# EAGLE board Christmas_Star (EAGLE 7.5.0)
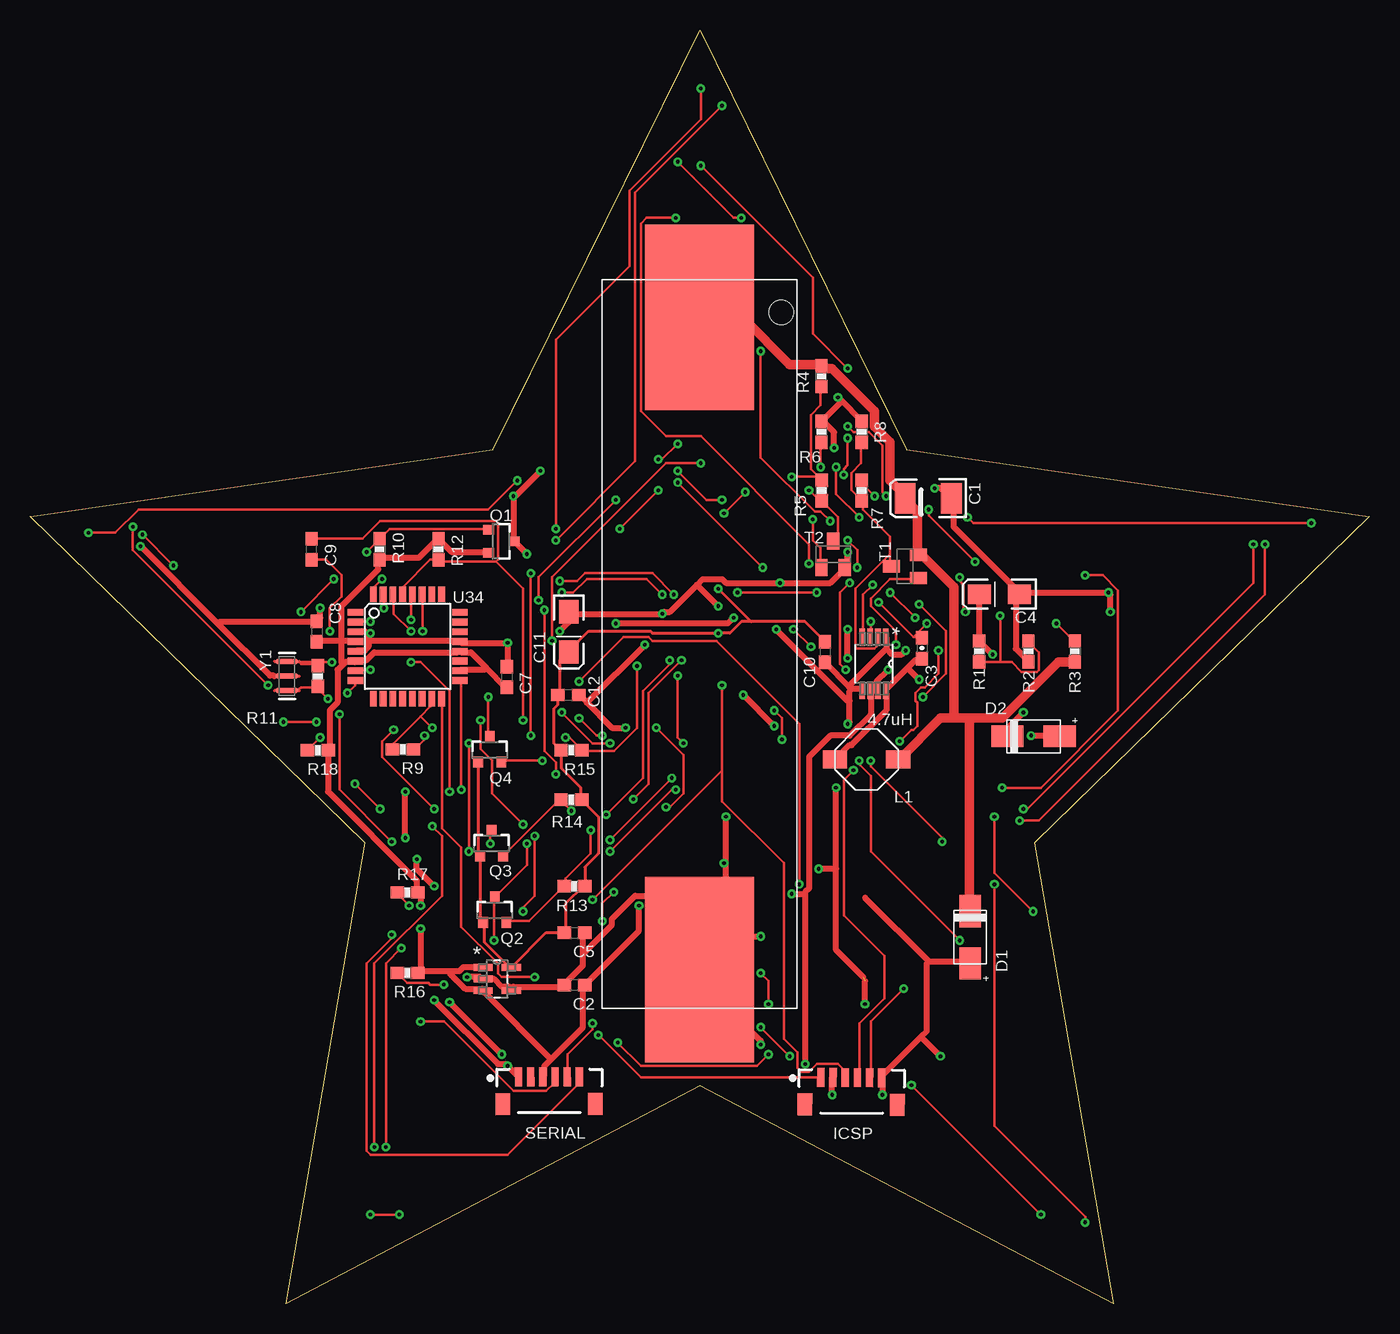
[diagram p0: board, top side]
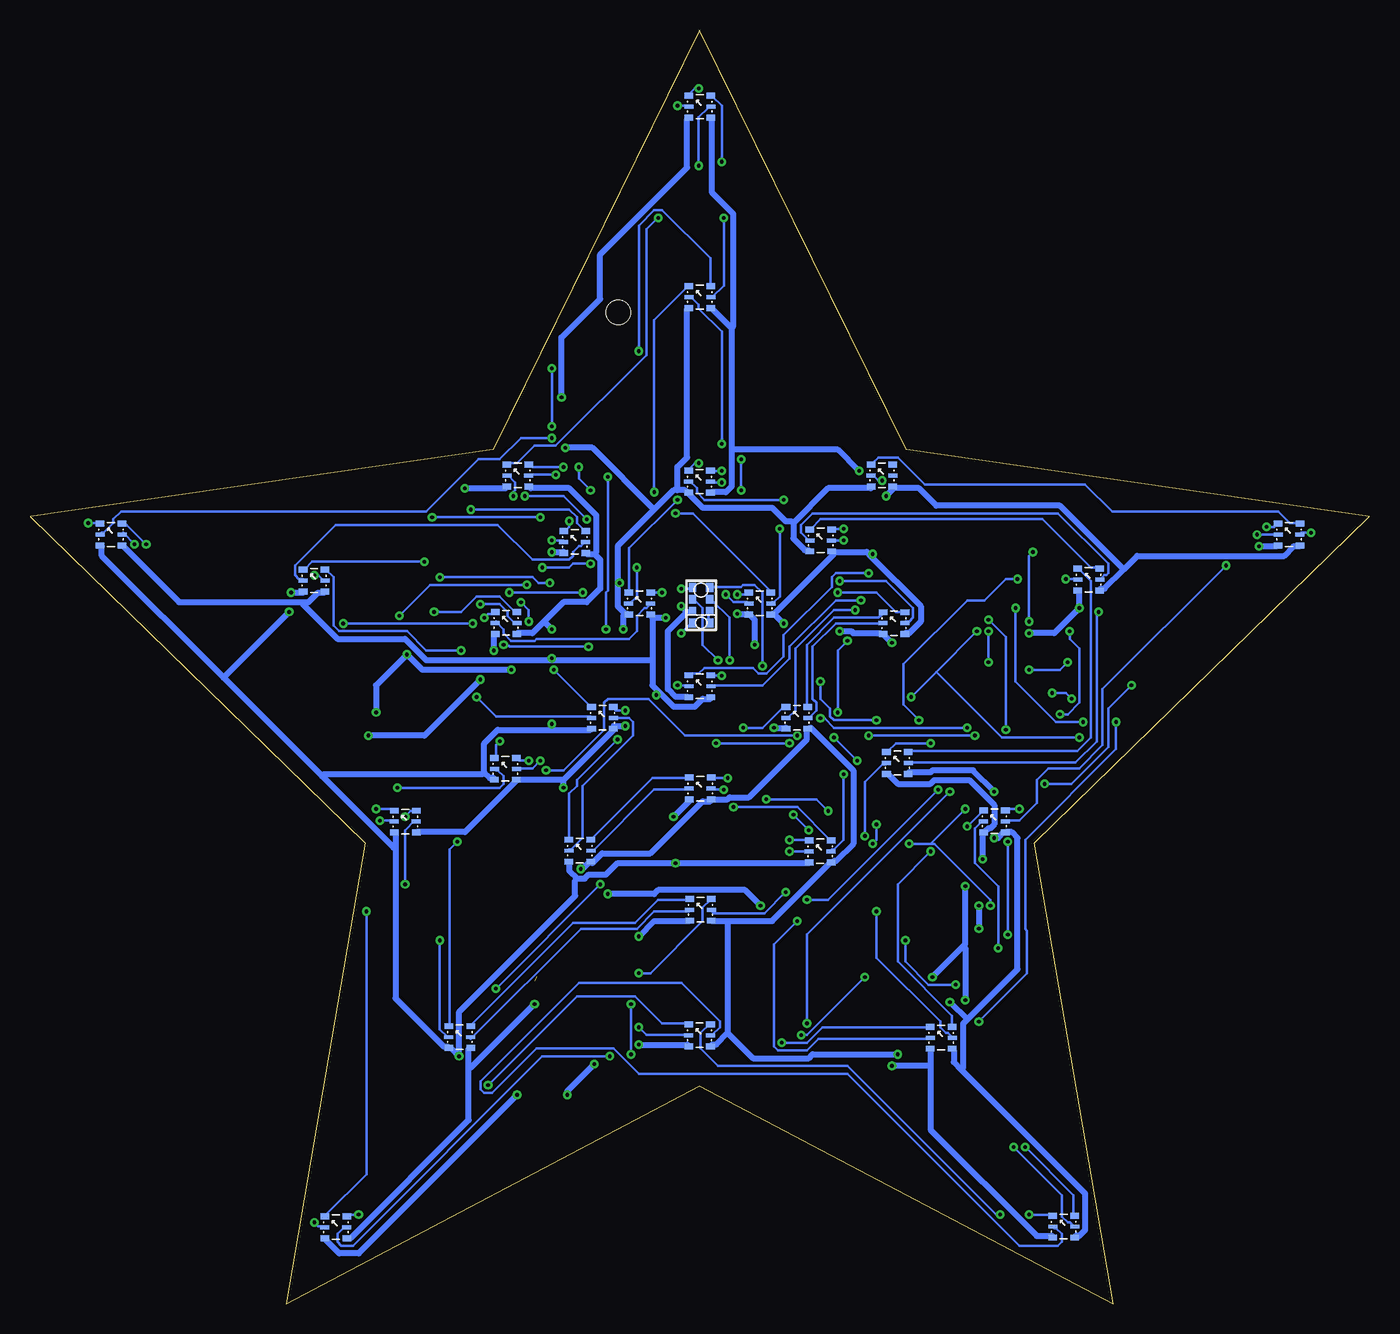
[diagram p1: board, bottom side, seen from below]

Size 110 x 104.62 mm. Coordinates in mm from the lower left corner, seen from the top.
Outline: 55,104.62 72,70.18 110,64.66 82.5,37.85 88.99,0 55,17.87 21.01,0 27.5,37.85 0,64.66 38,70.18 55,104.62
Copper layers (1*16): Top 0.035mm / dielectric 1.5mm / Bottom 0.035mm
Design rules "NYAKARUHAZ_StandardNYAK": minimum track width 6mil, minimum drill 12mil, track to track 6mil, track to pad 6mil, pad to pad 6mil, via to via 6mil, smd to smd 6mil, copper to edge 20mil, drill to drill 8mil, minimum pad ring 10mil, minimum via ring 8mil, stop-mask expansion 4mil, vias tented up to drill 0mil, thermal gap 6mil
Net classes: 0 default: width 0.203 mm; 1 5V: width 0.508 mm; 2 3.3V: width 0.254 mm; 3 GND: width 0.508 mm; 4 APA102_VCC: width 0.508 mm; 5 POWER_INPUT: width 0.762 mm; 6 SW: width 0.508 mm

## Footprints (pad centres in the part's own frame; a part is rotated, then mirrored left to right if it is on the bottom)
KEYSTONE1088 = smd 15.24 x 8.941: + 7.62,0; - 61.214,0 | hole 2: 7.2,6.7
EIA3528-KIT = smd 1.7 x 2.5: A 1.9,0; C -1.9,0
0603-CAP = smd 1.1 x 1: 1 -0.85,0; 2 0.85,0
EIA3216-KIT = smd 1.9 x 1.6: A 1.65,0; C -1.65,0
DIOM4427X270N = smd 2.65 x 1.75: A 2.15,0; C -2.15,0
GP-635T = smd 0.6 x 1.55: 1 -2.54,1.27; 2 -1.54,1.27; 3 -0.54,1.27; 4 0.46,1.27; 5 1.46,1.27; 6 2.46,1.27 | smd 1.2 x 1.8: P$1 -3.84,-0.955; P$2 3.76,-0.955
LTF5022 = smd 2 x 1.5: P$1 -2.6,0; P$2 2.6,0
SOT23-3 = smd 0.8 x 0.9: 1 -0.95,-1; 2 0.95,-1; 3 0,1.1
0603-RES = smd 1.1 x 1: 1 -0.85,0; 2 0.85,0
SOT23-BEC = smd 1 x 1.4: B -0.95,-1.1; C 0,1.1; E 0.95,-1.1
MUA08A = smd 1.372 x 0.457: 1 -2.197,0.975; 2 -2.197,0.325; 3 -2.197,-0.325; 4 -2.197,-0.975; 5 2.197,-0.975; 6 2.197,-0.325; 7 2.197,0.325; 8 2.197,0.975
DDC5 = smd 1.575 x 0.559: 1 -1.168,0.95; 2 -1.168,0; 3 -1.168,-0.95; 4 1.168,-0.95; 5 1.168,0.95
APA102_2020 = smd 0.8 x 0.3: C_IN -0.9,0; CL_OUT 0.9,0 | smd 0.8 x 0.5: D_IN -0.9,0.9; D_OUT 0.9,0.9; GND -0.9,-0.9; VCC 0.9,-0.9
TQFP32 = smd 1.27 x 0.559: 1 -4.293,2.8; 2 -4.293,2; 3 -4.293,1.2; 4 -4.293,0.4; 5 -4.293,-0.4; 6 -4.293,-1.2; 7 -4.293,-2; 8 -4.293,-2.8; 17 4.293,-2.8; 18 4.293,-2; 19 4.293,-1.2; 20 4.293,-0.4; 21 4.293,0.4; 22 4.293,1.2; 23 4.293,2; 24 4.293,2.8 | smd 0.559 x 1.27: 9 -2.8,-4.293; 10 -2,-4.293; 11 -1.2,-4.293; 12 -0.4,-4.293; 13 0.4,-4.293; 14 1.2,-4.293; 15 2,-4.293; 16 2.8,-4.293; 25 2.8,4.293; 26 2,4.293; 27 1.2,4.293; 28 0.4,4.293; 29 -0.4,4.293; 30 -1.2,4.293; 31 -2,4.293; 32 -2.8,4.293
APDS-9960 = smd 0.6 x 0.72: 1 0.7,1.455; 2 0.7,0.485; 3 0.7,-0.485; 4 0.7,-1.455; 5 -0.7,-1.455; 6 -0.7,-0.485; 7 -0.7,0.485; 8 -0.7,1.455
RESONATOR-SMD-3.2X1.3 = smd 0.45 x 1.905: 1 -1.2,0; 2 0,0; 3 1.2,0

## Placement (x,y rotation side)
BAT1  KEYSTONE1088  [KEYSTONE1088]  54.99,88.65 270 top
C1  220uF  [EIA3528-KIT]  73.79,66.17 180 top
C2  1uF  [0603-CAP]  44.7,26.16 180 top
C3  4.7pF  [0603-CAP]  73.25,53.85 270 top
C4  100uF  [EIA3216-KIT]  79.63,58.29 180 top
C5  1uF  [0603-CAP]  44.7,30.48 0 top
C7  0.1uF  [0603-CAP]  39.14,51.49 270 top
C8  0.1uF  [0603-CAP]  23.52,55.22 270 top
C9  0.1uF  [0603-CAP]  23.11,61.98 90 top
C10  1uF  [0603-CAP]  65.28,53.54 270 top
C11  100uF  [EIA3216-KIT]  44.25,55.19 270 top
C12  1uF  [0603-CAP]  44.2,50.01 0 top
D1  MBRA340  [DIOM4427X270N]  77.22,30.1 270 top
D2  MBRA340  [DIOM4427X270N]  82.42,46.61 0 top
ICSP  GP-635TSMD  [GP-635T]  67.49,17.3 359.7 top
L1  4.7uH  [LTF5022]  68.71,44.7 180 top
Q1  STR2P3LLH6  [SOT23-3]  38.66,62.64 270 top
Q2  BSS138  [SOT23-3]  38.15,32.31 0 top
Q3  BSS138  [SOT23-3]  37.9,37.8 0 top
Q4  BSS138  [SOT23-3]  37.74,45.49 0 top
R1  300K  [0603-RES]  77.95,53.59 270 top
R2  100K  [0603-RES]  82.02,53.59 90 top
R3  150K  [0603-RES]  85.83,53.59 270 top
R4  1M3  [0603-RES]  65,76.2 90 top
R5  1M2  [0603-RES]  65.02,66.8 90 top
R6  1M8  [0603-RES]  65,71.63 270 top
R7  3M  [0603-RES]  68.3,66.8 270 top
R8  1M  [0603-RES]  68.3,71.63 270 top
R9  330  [0603-RES]  30.61,45.54 0 top
R10  10K  [0603-RES]  28.7,61.98 270 top
R11  1M  [0603-RES]  23.62,51.56 90 top
R12  10K  [0603-RES]  33.53,61.98 90 top
R13  10K  [0603-RES]  44.7,34.29 0 top
R14  10K  [0603-RES]  44.45,41.4 0 top
R15  10K  [0603-RES]  44.45,45.47 180 top
R16  10K  [0603-RES]  30.99,27.18 0 top
R17  10K  [0603-RES]  30.99,33.78 0 top
R18  10K  [0603-RES]  23.62,45.47 0 top
SERIAL  GP-635TSMD  [GP-635T]  42.65,17.35 0.1 top
T1  2N2907  [SOT23-BEC]  71.86,60.58 90 top
T2  2N2222  [SOT23-BEC]  65.96,61.57 0 top
U1  LM2623  [MUA08A]  69.32,52.58 270 top
U2  TPS78001_DDC_5  [DDC5]  38.35,26.67 0 top
U3  APA102  [APA102_2020]  54.99,50.72 0 bottom
U4  APA102  [APA102_2020]  50.06,57.53 0 bottom
U5  APA102  [APA102_2020]  45.06,62.71 0 bottom
U6  APA102  [APA102_2020]  40.03,68.05 0 bottom
U7  APA102  [APA102_2020]  55.02,67.54 0 bottom
U8  APA102  [APA102_2020]  54.99,82.7 0 bottom
U9  APA102  [APA102_2020]  54.99,98.35 0 bottom
U10  APA102  [APA102_2020]  59.94,57.53 0 bottom
U11  APA102  [APA102_2020]  65.28,62.59 0 bottom
U12  APA102  [APA102_2020]  69.95,68.05 0 bottom
U13  APA102  [APA102_2020]  70.92,55.93 0 bottom
U14  APA102  [APA102_2020]  86.69,59.41 0 bottom
U15  APA102  [APA102_2020]  103.38,63.2 0 bottom
U16  APA102  [APA102_2020]  62.99,48.13 0 bottom
U17  APA102  [APA102_2020]  70.97,43.94 0 bottom
U18  APA102  [APA102_2020]  79.2,39.6 0 bottom
U19  APA102  [APA102_2020]  64.85,37.21 0 bottom
U20  APA102  [APA102_2020]  74.73,21.89 0 bottom
U21  APA102  [APA102_2020]  84.91,6.27 0 bottom
U22  APA102  [APA102_2020]  54.97,42.32 0 bottom
U23  APA102  [APA102_2020]  54.94,32.36 0 bottom
U24  APA102  [APA102_2020]  55.02,22.05 0 bottom
U25  APA102  [APA102_2020]  45.11,37.16 0 bottom
U26  APA102  [APA102_2020]  35.15,21.84 0 bottom
U27  APA102  [APA102_2020]  25.1,6.32 0 bottom
U28  APA102  [APA102_2020]  47.02,48.13 0 bottom
U29  APA102  [APA102_2020]  38.76,44.42 0 bottom
U30  APA102  [APA102_2020]  30.78,39.62 0 bottom
U31  APA102  [APA102_2020]  39.04,55.91 0 bottom
U32  APA102  [APA102_2020]  23.04,59.49 0 bottom
U33  APA102  [APA102_2020]  6.58,63.2 0 bottom
U34  ATMEGA328P-AU  [TQFP32]  30.99,54 0 top
U35  APDS-9960  [APDS-9960]  54.89,57.38 0 bottom
Y1  16MHz  [RESONATOR-SMD-3.2X1.3]  21.08,51.56 270 top

## Library data of the parts
BAT1 = keystone
C1 C2 C4 C5 C7-C10 C12 R1-R18 = SparkFun-Passives
C3 C11 = SparkFun-Capacitors
D1 D2 = Common-Parts-Library-Eagle; MANUFACTURER: Fairchild Semiconductor
ICSP SERIAL = SparkFun-Sensors; PROD_ID: CONN-08249
L1 = LTF5022_Inductor
Q1 = SparkFun-DiscreteSemi; PROD_ID: TRANS-11153
Q2-Q4 = SparkFun-DiscreteSemi; PROD_ID: TRANS-00830
T1 T2 = transistor
U1 = lm2623; MANUFACTURER_PART_NUMBER: lm2623ammnopb; VENDOR: National
U2 = TPS780; DATASHEETURL: httpwww.ti.comlitgpnTPS78001; FAMILY_NAME: SINGLE CHANNEL LDO; GENERIC_PART_NUMBER: TPS78001; INDUSTRY_STD_PKG_TYPE: SOT; MANUFACTURER: Texas Instruments; MANUFACTURER_PART_NUMBER: tps78001_ddc_5; PACKAGE_DESIGNATOR: DDC; PIN_COUNT: 5; VENDOR: Texas Instruments
U3-U33 = jos-ph
U34 = eagle-book
U35 = SparkFun-Sensors; PROD_ID: SEN-12005
Y1 = SparkFun-Clocks; PROD_ID: XTAL-08900

## Nets
3.3V [3.3V]: C5.1 C10.1 C11.A C12.1 Q2.1 Q3.1 Q4.1 R13.2 R14.2 R15.2 U2.5 U35.5 U35.8
5V [5V]: C2.1 C4.A C7.2 C8.2 D2.C ICSP.2 Q1.2 R1.1 R10.2 R12.2 R16.2 R17.2 R18.2 SERIAL.3 U1.6 U1.7 U2.1 U2.3 U34.4 U34.6 U34.18 U34.20
APA102_DATA_IN: R9.2 U3.D_IN
APA102_ENABLE: Q1.1 R10.1 U34.2
APA102_VCC [APA102_VCC]: Q1.3 U3.VCC U4.VCC U5.VCC U6.VCC U7.VCC U8.VCC U9.VCC U10.VCC U11.VCC U12.VCC U13.VCC U14.VCC U15.VCC U16.VCC U17.VCC U18.VCC U19.VCC U20.VCC U21.VCC U22.VCC U23.VCC U24.VCC U25.VCC U26.VCC U27.VCC U28.VCC U29.VCC U30.VCC U31.VCC U32.VCC U33.VCC
APDS_INT: Q2.2 R13.1 U35.2
APDS_LDR_LEDK: U35.3 U35.4
APDS_SCL: Q3.2 R14.1 U35.7
APDS_SDA: Q4.2 R15.1 U35.1
CO1: U4.C_IN U31.CL_OUT
CO2: U5.C_IN U32.CL_OUT
CO3: U6.C_IN U33.CL_OUT
CTS: SERIAL.2
DO1: U4.D_IN U31.D_OUT
DO2: U5.D_IN U32.D_OUT
DO3: U6.D_IN U33.D_OUT
DTR: C9.1 SERIAL.6
FB: R1.2 R2.2 U1.4
FREQ: C3.1 R3.1 U1.3
GND [GND]: BAT1.- C1.C C2.2 C4.C C5.2 C7.1 C8.1 C10.2 C11.C C12.2 D1.A ICSP.6 R2.1 R6.1 R8.1 SERIAL.1 T2.E U1.1 U1.5 U2.2 U2.4 U3.GND U4.GND U5.GND U6.GND U7.GND U8.GND U9.GND U10.GND U11.GND U12.GND U13.GND U14.GND U15.GND U16.GND U17.GND U18.GND U19.GND U20.GND U21.GND U22.GND U23.GND U24.GND U25.GND U26.GND U27.GND U28.GND U29.GND U30.GND U31.GND U32.GND U33.GND U34.3 U34.5 U34.21 U35.6 Y1.2
INT: Q2.3 R16.1 U34.32
LM2623_ENABLE: R7.2 R8.2 T1.C U1.2
MISO: ICSP.1 U34.16
MOSI: ICSP.4 R9.1 U34.15
N$1: U3.D_OUT U7.D_IN
N$2: U3.CL_OUT U7.C_IN
N$3: U7.D_OUT U10.D_IN
N$4: U7.CL_OUT U10.C_IN
N$5: U10.D_OUT U13.D_IN
N$6: U10.CL_OUT U13.C_IN
N$7: U13.D_OUT U16.D_IN
N$8: U13.CL_OUT U16.C_IN
N$9: U16.D_OUT U19.D_IN
N$10: U16.CL_OUT U19.C_IN
N$11: U19.D_OUT U22.D_IN
N$12: U19.CL_OUT U22.C_IN
N$13: U22.D_OUT U25.D_IN
N$14: U22.CL_OUT U25.C_IN
N$15: U25.D_OUT U28.D_IN
N$16: U25.CL_OUT U28.C_IN
N$17: U28.D_OUT U31.D_IN
N$18: U28.CL_OUT U31.C_IN
N$19: U4.D_OUT U8.D_IN
N$20: U4.CL_OUT U8.C_IN
N$21: U8.D_OUT U11.D_IN
N$22: U8.CL_OUT U11.C_IN
N$23: U11.D_OUT U14.D_IN
N$24: U11.CL_OUT U14.C_IN
N$25: U14.D_OUT U17.D_IN
N$26: U14.CL_OUT U17.C_IN
N$27: U17.D_OUT U20.D_IN
N$28: U17.CL_OUT U20.C_IN
N$29: U20.D_OUT U23.D_IN
N$30: U20.CL_OUT U23.C_IN
N$31: U23.D_OUT U26.D_IN
N$32: U23.CL_OUT U26.C_IN
N$33: U26.D_OUT U29.D_IN
N$34: U26.CL_OUT U29.C_IN
N$35: U29.D_OUT U32.D_IN
N$36: R4.1 R5.2 T1.B
N$37: R5.1 R6.2 T2.C
N$38: R11.2 U34.7 Y1.1
N$39: R11.1 U34.8 Y1.3
N$40: U29.CL_OUT U32.C_IN
N$41: U5.D_OUT U9.D_IN
N$43: R7.1 T2.B
N$44: U5.CL_OUT U9.C_IN
N$45: U9.D_OUT U12.D_IN
N$46: U9.CL_OUT U12.C_IN
N$48: U12.D_OUT U15.D_IN
N$49: U12.CL_OUT U15.C_IN
N$50: U15.D_OUT U18.D_IN
N$51: U15.CL_OUT U18.C_IN
N$52: U18.D_OUT U21.D_IN
N$53: U18.CL_OUT U21.C_IN
N$55: U21.D_OUT U24.D_IN
N$56: U21.CL_OUT U24.C_IN
N$58: U24.D_OUT U27.D_IN
N$60: U24.CL_OUT U27.C_IN
N$61: U27.D_OUT U30.D_IN
N$62: U27.CL_OUT U30.C_IN
N$63: U30.D_OUT U33.D_IN
N$64: U30.CL_OUT U33.C_IN
POWER_INPUT [POWER_INPUT]: BAT1.+ C1.A D1.C L1.P$1 R3.2 R4.2 T1.E
RST: C9.2 ICSP.5 R12.1 U34.29
RXD: SERIAL.5 U34.30
SCK: ICSP.3 U3.C_IN U34.17
SCL: Q3.3 R17.1 U34.28
SDA: Q4.3 R18.1 U34.27
SW [SW]: C3.2 D2.A L1.P$2 U1.8
TXD: SERIAL.4 U34.31

## Tracks (layer width: path | path; a pad name or v marks a point on that pad's centre or on a via)
3.3V  (via drill 0.3)
  Top 0.254: Q4.1 36.83,44.45 36.83,36.83 Q3.1 36.99,36.67 36.99,31.59 37.15,31.43 Q2.1 37.31,31.27 37.31,29.69 39.37,27.62 U2.5 42.39,30.48 C5.1 43.97,30.48 43.97,32.86 45.4,34.29 R13.2 45.56,35.88 46.67,36.99 46.67,40.01 45.4,41.27 R14.2 45.24,41.43 45.24,42.39 43.66,43.97 43.66,45.4 R15.2 43.5,45.56 43.02,46.04 43.02,48.9 43.34,49.21 43.34,50.01 C12.1 43.5,50.16 43.5,52.86 44.13,53.5 C11.A 44.29,53.66 45.88,55.24 50.96,55.24 51.12,55.09 v56.52,55.09 57.47,55.09 58.42,56.04 59.21,56.04 | 59.21,56.04 63.66,56.04 65.25,54.45 C10.1 | 59.21,56.04 v56.52,58.74
  Bottom 0.254: v56.52,55.09 55.72,55.88 U35.5 | v56.52,58.74 55.72,58.74 U35.8
5V  (via drill 0.3)
  Top 0.305: 69.06,50.32 U1.6 69.06,50.16 | 69.53,50.32 U1.7 69.53,50.48
  Top 0.508: C4.A 77.95,58.26 77.95,54.45 R1.1 78.11,54.29 v79.06,53.34 | v81.6,48.58 80.33,47.31 80.33,46.67 D2.C | 69.53,50.32 69.06,50.32 | v65.88,17.14 65.88,18.57 ICSP.2 | 63.66,33.66 63.66,33.81 63.98,34.13 63.98,44.93 65.72,46.67 67.31,46.67 69.06,48.42 69.06,50.16 | 63.66,33.66 v63.66,19.68 | v70.48,52.07 69.53,51.12 69.53,50.48 | 34.45,27.3 35.24,27.3 35.56,27.62 37.15,27.62 U2.1 | 34.45,27.3 31.91,27.3 R16.2 32.07,27.46 v32.07,30.8 | 34.45,27.3 34.45,27.15 35.72,25.88 37.15,25.88 U2.3 37.31,25.56 42.78,20.08 | 42.78,20.08 42.23,19.53 42.23,18.73 SERIAL.3 | 42.78,20.08 45.4,22.7 45.4,26.04 C2.1 45.72,26.35 50.01,30.64 v50.01,32.7 | Q1.2 37.62,61.75 34.61,61.75 33.66,62.71 R12.2 33.34,62.71 31.91,61.28 28.73,61.28 R10.2 28.57,60.96 28.57,60.33 25.56,57.31 25.56,54.45 | 37.47,52.23 36.2,53.5 35.4,53.5 U34.20 35.08,53.5 28.26,53.5 27.62,52.86 26.83,52.86 U34.6 26.67,52.7 25.88,52.7 25.72,52.55 | 37.47,52.23 39.05,50.64 C7.2 | U34.18 35.4,52.07 37.31,52.07 37.47,52.23 | 25.56,54.45 26.67,54.45 U34.4 | 25.56,54.45 23.65,54.45 C8.2 | 25.72,52.55 25.24,52.07 25.24,49.37 24.61,48.74 24.61,45.56 R18.2 24.45,45.24 24.45,42.07 31.75,34.77 31.75,33.81 R17.2 32.07,33.81 v32.07,32.7 | 25.56,54.45 25.56,52.7 25.72,52.55 | v62.55,33.66 63.66,33.66
  Bottom 0.508: v81.6,48.58 81.6,50.8 v79.06,53.34 77.79,52.07 v70.48,52.07 | v65.88,17.14 65.88,17.46 v63.66,19.68 | v32.07,32.7 v32.07,30.8 | v62.55,33.66 58.74,33.66 58.42,33.97 51.28,33.97 v50.01,32.7
APA102_DATA_IN  (via drill 0.3)
  Top 0.203: v41.12,46.67 v41.12,60.01 | v32.38,46.67 32.38,46.35 31.59,45.56 R9.2
  Bottom 0.203: v41.12,60.01 43.81,60.01 44.13,59.69 44.13,58.9 48.1,54.93 48.1,53.18 49.53,51.75 50.16,51.75 50.64,52.23 54.61,52.23 55.09,51.75 55.88,51.75 U3.D_IN | v32.38,46.67 v41.12,46.67
APA102_ENABLE  (via drill 0.3)
  Top 0.203: Q1.1 37.62,63.66 29.53,63.66 28.73,62.87 R10.1 28.57,62.71 v27.62,61.75 | v27.94,56.04 26.83,56.04 U34.2
  Bottom 0.203: v27.94,56.04 27.94,61.44 v27.62,61.75
APA102_VCC  (via drill 0.3)  (1 unrouted)
  Top 0.508: v40.8,61.59 39.85,62.55 Q1.3 39.69,62.87 v39.69,66.36 39.85,66.36 v41.91,68.42 | v67.15,53.02 v67.15,55.4 | v30.8,38.26 v30.8,42.07 | v68.58,24.61 68.58,26.51 | 66.2,35.72 66.2,29.05 68.42,26.83 | 66.2,35.72 v66.2,42.39 | 66.2,35.72 v64.77,35.72 | v38.73,20.48 v34.45,24.77 | v61.12,47.47 v58.58,50.01 | v48.1,55.88 57.31,55.88 v57.78,56.36
  Bottom 0.508: 52.39,80.17 52.39,70.17 | 52.39,70.17 52.39,67.15 52.86,66.67 53.98,66.67 U7.VCC | 52.39,80.17 53.98,81.76 U8.VCC | U9.VCC 53.98,97.31 53.98,91.28 52.23,89.53 52.23,80.33 52.39,80.17 | 40.96,61.44 41.27,61.75 44.13,61.75 U5.VCC 43.97,61.59 48.9,56.67 | 40.96,61.44 36.83,57.31 36.83,56.04 37.78,55.09 38.1,55.09 U31.VCC | 48.9,56.67 49.05,56.67 U4.VCC | v40.8,61.59 40.96,61.44 | 20.16,60.33 21.75,58.74 22.07,58.74 U32.VCC | 20.16,60.33 19.05,61.44 6.99,61.44 6.19,62.23 5.71,62.23 U33.VCC | 39.05,66.99 36.99,66.99 35.56,65.56 25.4,65.56 20.16,60.33 | 39.05,66.99 U6.VCC | 39.05,66.99 v39.69,66.36 | 52.39,70.17 43.66,70.17 v41.91,68.42 | 67.79,56.04 66.2,57.63 64.29,57.63 63.18,58.74 63.18,61.12 63.66,61.59 | 67.79,56.04 68.74,55.09 70.01,55.09 U13.VCC | 63.66,61.59 64.29,61.59 U11.VCC | U12.VCC 68.9,66.99 65.72,66.99 63.5,64.77 63.5,61.75 63.66,61.59 | 58.26,50.16 58.9,50.8 58.9,52.86 | 58.26,50.16 57.15,49.05 55.4,49.05 54.77,49.69 54.13,49.69 U3.VCC | 58.9,56.36 58.9,56.52 U10.VCC | 58.9,56.36 58.9,52.86 | 87.63,57.63 97.79,57.63 102.39,62.23 U15.VCC | 87.63,57.63 87.15,57.63 86.36,58.42 85.88,58.42 U14.VCC | 67.15,52.86 77.47,52.86 79.22,54.61 84.77,54.61 87.63,57.47 87.63,57.63 | 67.15,52.86 58.9,52.86 | v67.15,55.4 67.79,56.04 | v67.15,53.02 67.15,52.86 | 33.5,19.21 34.13,19.84 34.13,20.8 U26.VCC | 33.5,19.21 23.34,9.05 23.34,6.03 23.81,5.56 24.13,5.56 U27.VCC | 33.02,23.34 33.34,23.02 33.34,19.37 33.5,19.21 | 33.02,23.34 28.89,27.46 28.89,38.26 29.37,38.73 29.84,38.73 U30.VCC 30,38.73 30.48,38.26 v30.8,38.26 | v30.8,42.07 32.54,43.81 35.88,43.81 36.04,43.66 37.78,43.66 U29.VCC
  Bottom 0.508: 52.7,31.43 53.98,31.43 U23.VCC | 52.7,31.43 49.05,31.43 44.29,36.2 U25.VCC 43.97,36.35 43.81,36.35 42.39,37.78 42.39,43.81 45.88,47.31 U28.VCC 46.2,47.15 46.2,46.35 50.96,41.59 52.55,41.59 52.7,41.43 53.82,41.43 U22.VCC 54.13,41.27 54.77,41.27 59.05,36.99 63.02,36.99 63.82,36.2 U19.VCC 64.14,36.2 64.61,35.72 v64.77,35.72 | 52.7,22.23 53.66,21.27 53.98,21.27 U24.VCC | 52.7,31.43 52.7,22.23 | 66.2,43.02 70.01,43.02 U17.VCC 70.17,42.86 74.3,38.73 78.26,38.73 U18.VCC | 66.2,43.02 62.07,47.15 U16.VCC 62.07,47.47 v61.12,47.47 | 73.98,19.37 73.98,15.08 83.66,5.4 83.98,5.4 U21.VCC | 73.98,19.37 73.98,20.95 U20.VCC | v68.58,24.61 73.82,19.37 73.98,19.37 | v66.2,42.39 66.2,43.02 | v34.45,24.77 33.02,23.34 | v38.73,20.48 45.72,20.48 46.04,20.16 50.64,20.16 52.7,22.23 | v58.58,50.01 58.42,50.01 58.26,50.16 | v48.1,55.88 48.9,56.67 | 58.9,56.36 v57.78,56.36
APDS_INT  (via drill 0.3)
  Top 0.203: v52.55,52.86 52.55,52.55 50.32,50.32 50.32,43.18 v47.31,40.16 | v46.04,38.89 46.04,36.99 43.97,34.92 43.97,34.29 R13.1 43.81,34.29 40.96,31.43 39.21,31.43 Q2.2
  Bottom 0.203: v52.55,52.86 52.55,56.36 53.98,57.78 54.13,57.78 U35.2 | v46.04,38.89 v47.31,40.16
APDS_LDR_LEDK
  Bottom 0.203: U35.4 54.29,56.04 54.29,56.83 U35.3
APDS_SCL  (via drill 0.3)
  Top 0.203: v53.5,52.86 50.8,50.16 50.8,42.7 v49.53,41.43 | v44.45,40.48 43.66,41.27 R14.1 43.5,41.43 38.89,36.83 Q3.2
  Bottom 0.203: v53.5,52.86 54.77,54.13 54.77,57.15 55.4,57.78 55.56,57.78 U35.7 | v49.53,41.43 45.4,41.43 v44.45,40.48
APDS_SDA  (via drill 0.3)
  Top 0.203: v49.85,52.39 49.85,47.31 47.94,45.4 45.4,45.4 R15.1 45.24,45.56 44.29,46.51 v43.97,46.51 | v42.07,44.61 38.73,44.61 Q4.2
  Bottom 0.203: v49.85,52.39 49.85,58.42 50.48,59.05 51.44,59.05 51.59,58.9 54.13,58.9 U35.1 | v43.97,46.51 v42.07,44.61
CO1  (via drill 0.3)
  Top 0.203: v43.5,59.37 44.93,59.37 45.56,60.01 51.12,60.01 v52.86,58.26
  Bottom 0.203: v43.5,59.37 39.69,59.37 37.47,57.15 37.47,56.36 37.78,56.04 38.1,56.04 U31.CL_OUT | v52.86,58.26 52.23,57.63 51.12,57.63 U4.C_IN
CO2
  Bottom 0.203: U32.CL_OUT 22.07,59.53 21.75,59.85 21.59,59.85 21.43,60.01 21.43,60.8 25.56,64.93 45.72,64.93 46.67,63.98 46.67,63.34 46.04,62.71 U5.C_IN
CO3  (via drill 0.3)
  Top 0.203: v4.76,63.34 6.99,63.34 8.89,65.25 37.62,65.25 v40.01,67.63
  Bottom 0.203: v4.76,63.34 5.56,63.34 U33.CL_OUT | v40.01,67.63 40.32,67.63 40.8,68.1 U6.C_IN
DO1  (via drill 0.3)
  Top 0.203: v43.66,58.42 44.61,58.42 45.72,59.53 50.64,59.53 v51.91,58.26
  Bottom 0.203: v43.66,58.42 40.48,58.42 38.89,56.83 38.26,56.83 U31.D_OUT | v51.91,58.26 51.28,58.26 51.12,58.42 U4.D_IN
DO2
  Bottom 0.203: U32.D_OUT 22.23,60.48 22.86,60.48 26.83,64.45 45.09,64.45 45.88,63.66 U5.D_IN
DO3
  Bottom 0.203: U33.D_OUT 5.71,64.14 6.51,64.14 7.46,65.09 21.11,65.09 23.34,67.31 36.51,67.31 38.73,69.53 40.32,69.53 40.8,69.06 U6.D_IN
DTR  (via drill 0.3)
  Top 0.203: v24.61,55.24 24.61,57.15 25.56,58.1 25.56,59.85 24.29,61.12 23.18,61.12 C9.1 | v25.4,48.42 25.4,42.23 v29.69,37.94 | v29.69,30.32 29.69,30 27.62,27.94 27.62,12.54 27.94,12.22 39.21,12.22 45.09,18.1 45.09,18.57 SERIAL.6
  Bottom 0.203: v24.61,55.24 24.61,54.61 23.81,53.82 23.81,49.37 24.77,48.42 v25.4,48.42 | v29.69,30.32 v29.69,37.94
FB  (via drill 0.3)
  Top 0.203: 79.69,52.7 80.64,52.7 81.44,51.91 82.71,51.91 82.87,52.07 82.87,53.5 82.07,54.29 R2.2 | 79.69,52.7 78.11,52.7 R1.2 | v69.22,59.05 68.42,58.26 68.42,54.93 U1.4 | 79.69,52.7 v79.69,56.52
  Bottom 0.203: v69.22,59.05 77.15,59.05 v79.69,56.52
FREQ  (via drill 0.3)
  Top 0.203: 72.55,54.77 73.18,54.77 C3.1 | v69.69,57.63 72.55,54.77 | v69.06,56.04 69.06,54.93 U1.3 | v84.3,55.88 85.72,54.45 R3.1 | 72.55,54.77 v73.66,55.88
  Bottom 0.203: v69.69,57.63 69.06,56.99 v69.06,56.04 | v73.66,55.88 v84.3,55.88
GND  (via drill 0.3)
  Top 0.305: 68.26,50.48 U1.5
  Top 0.508: 27.78,54.93 27.78,54.45 | 27.78,54.45 27.78,53.98 27.46,53.66 26.83,53.66 U34.5 | 27.78,54.93 27.46,55.24 26.83,55.24 U34.3 | C7.1 39.21,52.39 v39.21,54.29 35.4,54.29 U34.21 35.08,54.45 27.78,54.45 | v23.81,57.15 23.81,56.36 23.65,56.2 C8.1 23.34,56.04 15.56,56.04 15.4,55.88 | 15.4,55.88 19.68,51.59 20,51.59 20.07,51.56 | 15.4,55.88 v9.05,62.23 | v27.94,55.09 27.78,54.93 | v48.9,47.31 47.78,47.31 45.72,49.37 | 45.72,49.37 45.09,50.01 C12.2 | v67.15,61.75 67.15,60.64 66.99,60.48 T2.E 66.83,60.33 65.72,59.21 v61.59,59.21 57.15,59.21 56.83,59.53 55.24,59.53 54.77,59.05 | 54.77,59.05 52.55,56.83 52.07,56.83 v51.91,56.67 44.45,56.67 44.29,56.83 C11.C 44.77,56.52 v43.5,55.24 | v50.48,54.13 45.72,49.37 | 54.77,59.05 v56.52,57.31 | 66.67,74.14 68.26,72.55 R8.1 | 66.67,74.14 v66.36,74.45 | 66.67,74.14 65.09,72.55 R6.1 65.25,72.39 66.04,71.6 v66.04,70.33 | v60.01,30.16 57.78,30.16 55.09,27.46 BAT1.- | 57.15,36.2 57.15,29.84 BAT1.- | 57.15,36.2 v57.15,40.01 | v60.01,21.27 60.01,21.59 55.24,26.35 55.24,27.3 BAT1.- | v56.99,36.2 57.15,36.2 | SERIAL.1 40.01,18.73 v39.21,19.53 39.05,19.68 38.42,19.68 v33.18,24.92 | 39.53,25.88 39.69,26.04 43.81,26.04 C2.2 43.97,26.35 45.4,27.78 45.4,28.89 | 39.53,25.88 U2.4 | 45.4,28.89 45.4,30.48 C5.2 | 39.53,25.88 39.37,26.04 38.73,26.04 38.1,26.67 U2.2 36.99,26.83 v35.88,26.83 | v31.75,36.51 31.75,35.72 v33.18,34.29 | BAT1.- 56.99,33.5 49.69,33.5 47.78,31.59 47.78,31.11 45.56,28.89 45.4,28.89 | 73.82,28.1 77.15,28.1 D1.A | 68.58,33.34 73.82,28.1 | v70.01,17.14 70.01,18.41 ICSP.6 70.01,18.73 73.18,21.91 | 73.18,21.91 73.66,22.38 73.66,27.94 73.82,28.1
  Top 0.508: v74.3,66.99 74.77,66.99 75.56,66.2 C1.C 75.88,66.04 75.88,63.82 81.12,58.58 C4.C | C4.C 81.28,58.42 v88.58,58.42 88.74,58.26 v88.74,56.83 | R2.1 81.92,52.86 80.96,53.82 80.96,57.94 81.12,58.1 C4.C | v71.91,53.66 71.6,53.34 70.8,53.34 70.33,53.82 | 70.33,53.82 70.33,54.77 U1.1 | 67.47,50.48 67.23,50.72 | 67.23,50.72 65.41,52.55 C10.2 | 68.26,50.48 67.47,50.48 | 67.23,50.72 70.33,53.82 | 67.31,49.53 67.31,47.78 v67.15,47.62 | 67.31,49.53 67.31,50.32 67.47,50.48 | v74.77,20.32 73.18,21.91 | v61.28,55.4 67.15,49.53 67.31,49.53
  Bottom 0.508: v39.21,54.29 39.85,54.93 U31.GND 40.16,55.09 42.39,55.09 42.55,55.24 v43.5,55.24 | U32.GND 23.81,58.58 v23.81,57.15 25.88,55.09 v27.94,55.09 | v9.05,62.23 7.62,62.23 U33.GND | 56.04,56.83 55.72,56.83 U35.6 | 56.04,56.83 57.63,55.24 57.63,50.48 56.99,49.85 56.04,49.85 U3.GND | v48.9,47.31 47.94,47.31 U28.GND | v67.15,61.75 66.2,61.75 U11.GND | v51.91,56.67 51.12,56.67 U4.GND 50.8,56.52 50.48,56.2 v50.48,54.13 | v56.52,57.31 56.04,56.83 | v66.36,74.45 66.36,79.38 63.18,82.55 63.18,86.2 56.04,93.34 56.04,97.31 U9.GND | 47.31,64.14 47.31,62.87 46.35,61.91 46.04,61.91 U5.GND | 47.31,64.14 44.45,66.99 40.96,66.99 U6.GND | 61.12,56.67 60.96,56.67 U10.GND | 61.12,56.67 61.75,57.31 61.75,59.21 | 61.75,59.21 61.75,62.23 58.74,65.25 | 58.74,65.25 57.15,66.83 56.83,66.83 | 56.83,66.83 56.2,66.83 56.04,66.67 U7.GND 55.88,66.52 54.77,65.41 49.05,65.41 47.94,64.29 47.47,64.29 47.31,64.14 | 56.83,66.83 56.83,68.74 56.04,69.53 56.04,81.76 U8.GND | v66.04,70.33 63.82,70.33 58.74,65.25 | v61.59,59.21 61.75,59.21 | 65.09,34.92 64.45,34.92 64.14,35.24 62.71,35.24 61.75,36.2 v56.99,36.2 46.04,36.2 U25.GND | 65.09,34.92 65.72,35.56 65.72,36.2 U19.GND | v60.01,30.16 58.74,31.43 55.88,31.43 U23.GND | v57.15,40.01 55.88,41.27 U22.GND | v60.01,21.27 56.04,21.27 U24.GND | 36.04,19.53 36.04,20.8 U26.GND | 36.04,19.53 36.04,14.29 27.3,5.56 26.04,5.56 U27.GND | 36.04,19.53 v39.21,19.53 | U29.GND 39.53,43.5 38.73,42.7 36.04,42.7 35.72,43.02 32.86,43.02 30.8,40.96 30.8,39.37 31.11,39.05 31.27,39.05 31.59,38.73 U30.GND 31.75,38.58 v31.75,36.51 | v33.18,34.29 33.18,29.53 33.34,29.37 | v35.88,26.83 33.34,29.37
  Bottom 0.508: v33.18,24.92 33.18,29.21 33.34,29.37 | v70.01,17.14 83.03,4.13 84.61,4.13 85.72,5.24 U21.GND | v74.3,66.99 70.96,66.99 U12.GND | v88.58,58.42 87.63,58.42 U14.GND | v71.91,53.66 71.91,54.93 U13.GND | 67.15,47.15 71.6,47.15 72.71,46.04 72.71,43.66 | 67.15,47.15 63.98,47.15 U16.GND | 72.71,43.66 72.23,43.18 71.91,43.18 U17.GND | 67.15,47.15 v67.15,47.62 | 80.01,37.47 80.01,38.58 U18.GND | 80.01,37.47 80.01,25.08 76.04,21.11 75.72,21.11 U20.GND 75.41,20.95 v74.77,20.32 74.77,23.97 65.25,33.5 65.25,34.77 65.09,34.92 | 86.04,43.34 80.17,37.47 80.01,37.47 | 86.04,43.34 94.14,51.44 | 94.14,51.44 104.14,61.44 104.14,62.23 U15.GND | 72.71,43.66 72.87,43.5 85.88,43.5 86.04,43.34 | 94.14,51.44 v88.74,56.83 | v61.28,55.4 61.28,56.52 61.12,56.67
INT  (via drill 0.3)
  Top 0.203: v38.1,29.84 38.1,33.34 Q2.3 38.26,33.5 40.8,36.04 v40.8,37.78 | v33.97,26.19 32.86,26.19 32.7,26.35 30.96,26.35 30.16,27.15 R16.1 | v28.89,59.53 28.26,58.9 28.26,58.42 U34.32 | v36.99,47.94 36.99,45.56 37.94,44.61 37.94,41.91 v40.48,39.37
  Bottom 0.203: v38.1,29.84 38.1,28.1 36.2,26.19 v33.97,26.19 | v28.89,59.53 29.84,59.53 31.59,57.78 33.02,57.78 38.26,52.55 38.26,49.21 v36.99,47.94 | v40.48,39.37 40.48,38.1 v40.8,37.78
LM2623_ENABLE
  Top 0.203: 70.64,61.59 70.64,60.64 T1.C | 70.64,61.59 70.64,63.02 68.42,65.25 68.42,65.88 R7.2 68.26,66.04 67.47,66.83 67.47,68.26 68.26,69.06 68.26,70.64 R8.2 | 70.64,61.59 67.79,58.74 67.79,53.98 67.94,53.82 69.37,53.82 69.53,53.98 69.53,54.77 U1.2
MISO  (via drill 0.3)
  Top 0.203: v41.43,26.83 38.73,26.83 38.42,27.15 38.42,27.94 35.4,30.96 35.4,37.47 33.81,39.05 33.81,49.69 U34.16 | v46.67,22.07 50.16,18.57 64.93,18.57 ICSP.1
  Bottom 0.203: v41.43,26.83 46.2,22.07 v46.67,22.07
MOSI  (via drill 0.3)
  Top 0.203: 32.07,48.26 32.86,49.05 32.86,49.69 U34.15 | 32.07,48.26 29.84,46.04 29.84,45.56 R9.1 | v67.63,43.81 66.83,43.02 66.83,31.91 70.17,28.57 70.17,25.08 68.1,23.02 68.1,18.57 ICSP.4 | v46.99,46.67 46.51,46.67 v45.09,48.1 | 32.07,48.26 v33.02,47.31
  Bottom 0.203: v67.63,43.81 66.2,43.81 62.87,47.15 62.87,49.37 62.55,49.69 59.21,49.69 56.2,46.67 v46.99,46.67 | v45.09,48.1 44.77,48.1 43.97,47.31 v33.02,47.31
N$1  (via drill 0.3)
  Top 0.203: v53.18,51.59 53.18,46.51 v53.66,46.04 | v47.62,46.04 46.2,46.04 v43.66,48.58 | v42.86,54.45 42.86,59.69 52.23,69.06 v55.09,69.06
  Bottom 0.203: v53.18,51.59 53.98,51.59 U3.D_OUT | v47.62,46.04 v53.66,46.04 | v43.66,48.58 43.66,53.66 v42.86,54.45 | v55.09,69.06 55.4,69.06 55.88,68.58 U7.D_IN
N$2  (via drill 0.3)
  Top 0.203: v41.75,57.78 41.75,59.69 v48.1,66.04
  Bottom 0.203: v41.75,57.78 43.81,57.78 47.62,53.98 47.62,53.02 49.85,50.8 53.98,50.8 U3.CL_OUT | v48.1,66.04 54.61,66.04 55.24,66.67 55.24,66.99 55.88,67.63 U7.C_IN
N$3  (via drill 0.3)
  Top 0.203: v56.83,66.04 55.56,66.04 v53.18,68.42
  Bottom 0.203: v56.83,66.04 60.8,62.07 60.8,58.58 U10.D_IN | v53.18,68.42 53.98,68.42 U7.D_OUT
N$4  (via drill 0.3)
  Top 0.203: v60.17,60.48 v53.18,67.47
  Bottom 0.203: v53.18,67.47 53.98,67.47 U7.CL_OUT | v60.17,60.48 60.17,58.1 60.8,57.47 U10.C_IN
N$5  (via drill 0.3)
  Top 0.203: v70.64,58.42 v72.71,56.36 | v58.1,58.42 v64.61,58.42
  Bottom 0.203: v72.71,56.36 72.39,56.67 71.91,56.67 U13.D_IN | v64.61,58.42 v70.64,58.42 | v58.1,58.42 58.9,58.42 U10.D_OUT
N$6
  Bottom 0.203: U10.CL_OUT 59.05,57.47 59.37,57.15 59.53,57.15 60.17,56.52 60.17,55.24 60.8,54.61 68.42,54.61 68.58,54.45 70.48,54.45 71.12,55.09 71.12,55.4 71.75,56.04 U13.C_IN
N$7  (via drill 0.3)
  Top 0.203: v66.99,52.07 66.52,52.55 66.52,58.42 v67.31,59.21 | v76.36,59.69 76.36,59.37 76.68,59.05 76.68,56.99 v76.83,56.83
  Bottom 0.203: v66.99,52.07 63.98,49.05 U16.D_IN | v67.31,59.21 68.26,59.21 68.74,59.69 v76.36,59.69 | v76.83,56.83 74.61,56.83 73.34,58.1 71.44,58.1 70.17,56.83 U13.D_OUT
N$8  (via drill 0.3)
  Top 0.203: v73.34,49.85 75.25,51.75 75.25,55.24 v73.03,57.47
  Bottom 0.203: v73.34,49.85 71.75,48.26 63.98,48.26 U16.C_IN | v73.03,57.47 71.44,57.47 70.8,56.83 70.8,56.52 70.17,55.88 U13.CL_OUT
N$9  (via drill 0.3)
  Top 0.203: v61.75,46.35 61.75,48.1 v61.12,48.74
  Bottom 0.203: v61.75,46.35 65.09,43.02 65.09,42.55 65.72,41.91 65.72,38.26 U19.D_IN | v61.12,48.74 61.91,48.74 62.07,48.9 U16.D_OUT
N$10
  Bottom 0.203: U19.C_IN 65.72,37.31 65.56,37.31 64.61,38.26 64.61,42.55 60.48,46.67 60.48,47.78 60.8,48.1 62.07,48.1 U16.CL_OUT
N$11
  Bottom 0.203: U22.D_IN 55.88,43.18 58.9,43.18 63.82,38.26 U19.D_OUT
N$12
  Bottom 0.203: U22.C_IN 55.88,42.23 58.74,42.23 63.82,37.15 U19.CL_OUT
N$13  (via drill 0.3)
  Top 0.203: v52.7,43.18 v47.62,38.1
  Bottom 0.203: v47.62,38.1 46.04,38.1 U25.D_IN | v52.7,43.18 53.98,43.18 U22.D_OUT
N$14  (via drill 0.3)
  Top 0.203: v47.62,37.15 52.7,42.23 v53.02,42.23
  Bottom 0.203: v47.62,37.15 46.04,37.15 U25.C_IN | v53.02,42.23 53.98,42.23 U22.CL_OUT
N$15  (via drill 0.3)
  Top 0.203: v52.23,40.8 52.55,40.8 53.66,41.91 53.66,45.09 v51.44,47.31
  Bottom 0.203: v52.23,40.8 46.99,40.8 44.29,38.1 U25.D_OUT | v51.44,47.31 49.85,47.31 48.26,48.9 47.94,48.9 U28.D_IN
N$16  (via drill 0.3)
  Top 0.203: v43.18,43.5 43.18,44.45 42.23,45.4 v42.23,56.99
  Bottom 0.203: v43.18,43.5 43.18,38.1 43.97,37.31 44.13,37.31 U25.CL_OUT | v42.23,56.99 43.97,56.99 47.15,53.82 47.15,48.74 47.78,48.1 U28.C_IN
N$17
  Bottom 0.203: U28.D_OUT 46.2,49.05 46.2,54.13 43.97,56.36 40.32,56.36 40.01,56.67 U31.D_IN
N$18
  Bottom 0.203: U31.C_IN 40.01,55.88 43.81,55.88 45.72,53.98 45.72,49.69 45.4,49.37 45.4,48.74 46.04,48.1 U28.CL_OUT
N$19  (via drill 0.3)
  Top 0.203: v58.74,66.67 v56.99,64.93
  Bottom 0.203: v56.99,64.93 55.56,64.93 49.21,58.58 U4.D_OUT | v58.74,66.67 58.74,80.8 56.04,83.5 U8.D_IN
N$20  (via drill 0.3)
  Top 0.203: v51.59,66.83 v48.42,63.66 | v51.59,69.37 51.91,69.37 v53.18,70.64
  Bottom 0.203: v48.42,63.66 48.42,58.1 48.9,57.63 49.05,57.63 U4.CL_OUT | v51.59,69.37 v51.59,66.83 | v53.18,70.64 53.18,79.85 55.09,81.76 55.09,82.07 55.72,82.71 U8.C_IN
N$21  (via drill 0.3)
  Top 0.203: v60.01,78.26 60.01,69.53 64.45,65.09 64.93,65.09 v65.72,64.29
  Bottom 0.203: v60.01,78.26 60.01,88.58 58.74,89.85 58.1,89.85 54.13,85.88 54.13,83.66 U8.D_OUT | v65.72,64.29 65.72,63.82 66.04,63.5 U11.D_IN
N$22  (via drill 0.3)
  Top 0.203: v53.02,89.22 50.64,89.22 50.16,88.74 50.16,73.34 52.23,71.28 55.09,71.28 63.98,62.39 v63.98,60.8 | v67.94,60.48 67.94,61.91 v67.15,62.71
  Bottom 0.203: v53.02,89.22 53.02,83.66 53.98,82.71 U8.CL_OUT | v63.98,60.8 65.41,60.8 65.72,60.48 v67.94,60.48 | v67.15,62.71 66.2,62.71 U11.C_IN
N$23  (via drill 0.3)
  Top 0.203: v73.82,65.25 73.82,64.77 v77.63,60.96
  Bottom 0.203: v73.82,65.25 65.72,65.25 65.09,64.61 65.09,64.14 64.45,63.5 U11.D_OUT | v77.63,60.96 86.84,60.96 87.47,60.33 U14.D_IN
N$24
  Bottom 0.203: U11.CL_OUT 64.45,62.55 64.77,62.23 64.93,62.23 65.41,61.75 65.41,61.44 65.72,61.12 68.74,61.12 71.6,63.98 84.93,63.98 88.27,60.64 88.27,59.85 87.95,59.53 87.63,59.53 U14.C_IN
N$25  (via drill 0.3)
  Top 0.203: v71.44,46.2 72.39,47.15 72.55,47.15 72.87,47.47 72.87,49.37 72.71,49.53 72.71,50.16 73.18,50.64 73.5,50.64 74.61,51.75 v74.61,53.66
  Bottom 0.203: v71.44,46.2 71.75,45.88 71.75,44.93 U17.D_IN | v74.61,53.66 77.47,53.66 79.06,55.24 84.61,55.24 85.09,55.72 85.09,59.69 85.72,60.33 U14.D_OUT
N$26  (via drill 0.3)
  Top 0.203: v79.85,42.39 83.03,42.39 89.38,48.74 89.38,58.58 88.11,59.85 v86.68,59.85
  Bottom 0.203: v79.85,42.39 71.44,42.39 71.12,42.7 71.12,43.34 71.6,43.81 71.75,43.81 U17.C_IN | v86.68,59.85 86.36,59.85 85.88,59.37 U14.CL_OUT
N$27  (via drill 0.3)
  Top 0.203: v74.93,37.94 74.93,38.26 69.06,44.13 v69.06,44.61
  Bottom 0.203: v74.93,37.94 75.56,37.31 75.56,22.86 U20.D_IN | v69.06,44.61 69.85,44.61 70.01,44.77 U17.D_OUT
N$28  (via drill 0.3)
  Top 0.203: v68.1,44.61 68.1,44.29 69.06,43.34 69.06,37.15 v76.36,29.84
  Bottom 0.203: v68.1,44.61 68.74,43.97 70.01,43.97 U17.CL_OUT | v76.36,29.84 76.36,22.54 75.72,21.91 U20.C_IN
N$29
  Bottom 0.203: U23.D_IN 55.88,33.18 58.42,33.18 60.33,31.27 65.41,31.27 73.82,22.86 U20.D_OUT
N$30
  Bottom 0.203: U23.C_IN 55.88,32.23 58.74,32.23 60.17,30.8 64.77,30.8 73.82,21.75 U20.CL_OUT
N$31  (via drill 0.3)
  Top 0.203: v48.26,21.43 50.16,19.53 59.69,19.53 v60.64,20.48 | v60.64,24.61 60.64,26.51 v60.01,27.15
  Bottom 0.203: v48.26,21.43 46.2,21.43 44.93,22.7 36.2,22.7 U26.D_IN | v60.64,24.61 v60.64,20.48 | v60.01,27.15 59.05,27.15 54.77,31.43 54.77,32.54 54.13,33.18 U23.D_OUT
N$32  (via drill 0.3)
  Top 0.203: v46.99,31.43 46.99,32.86 v47.94,33.81
  Bottom 0.203: v46.99,31.43 48.9,29.53 48.9,21.11 48.58,20.8 46.2,20.8 45.24,21.75 36.2,21.75 U26.C_IN | v47.94,33.81 49.69,32.07 53.82,32.07 53.98,32.23 U23.CL_OUT
N$33  (via drill 0.3)
  Top 0.203: v36.04,46.04 v36.04,37.15
  Bottom 0.203: v36.04,37.15 38.73,34.45 38.73,28.1 34.29,23.65 34.29,22.86 U26.D_OUT | v36.04,46.04 38.89,46.04 39.53,45.4 U29.D_IN
N$34  (via drill 0.3)
  Top 0.203: v40.48,32.23 40.48,32.54 41.43,33.5 v41.43,38.42
  Bottom 0.203: v40.48,32.23 40.48,28.42 35.24,23.18 35.24,22.7 34.77,22.23 34.61,22.23 34.29,21.91 U26.CL_OUT | v41.43,38.42 41.43,42.86 40.01,44.29 39.69,44.29 U29.C_IN
N$35
  Bottom 0.203: U29.D_OUT 37.78,45.4 23.97,45.4 22.86,46.51 22.86,59.37 23.81,60.33 U32.D_IN
N$36  (via drill 0.3)
  Top 0.203: 64.77,67.94 64.93,67.79 R5.2 64.77,67.94 | 64.77,67.94 64.14,68.58 64.14,73.03 64.93,73.82 64.93,75.25 R4.1 | v71.12,54.13 71.12,55.24 69.06,57.31 69.06,57.94 70.64,59.53 72.87,59.53 T1.B | v62.71,55.4 v64.14,53.98 | 64.77,67.94 v62.55,67.94
  Bottom 0.203: v71.12,54.13 70.8,54.13 70.64,53.98 v64.14,53.98 | v62.71,55.4 62.71,58.42 62.55,58.58 v62.55,67.94
N$37  (via drill 0.3)
  Top 0.203: T2.C 66.04,62.71 66.36,63.02 66.36,64.61 65.09,65.88 R5.1 64.93,65.88 v63.98,66.83 | v64.93,68.74 64.93,70.64 R6.2
  Bottom 0.203: v64.93,68.74 64.93,67.79 v63.98,66.83
N$38  (via drill 0.3)
  Top 0.203: 22.07,52.7 22.23,52.55 23.5,52.55 R11.2 | v27.94,52.07 26.83,52.07 U34.7 | 22.07,52.7 v24.77,52.7 | 22.07,52.7 Y1.1
  Bottom 0.203: v27.94,52.07 25.4,52.07 v24.77,52.7
N$39  (via drill 0.3)
  Top 0.203: 23.5,50.64 22.23,50.64 22.07,50.48 Y1.3 | v26.04,50.16 26.67,50.8 26.67,51.12 U34.8 | 23.5,50.64 v24.45,49.69 | 23.5,50.64 R11.1
  Bottom 0.203: v26.04,50.16 24.92,50.16 v24.45,49.69
N$40  (via drill 0.3)
  Top 0.203: v24.92,59.53 v22.23,56.83
  Bottom 0.203: v22.23,56.83 22.38,56.67 22.38,46.2 24.13,44.45 37.78,44.45 U29.CL_OUT | v24.92,59.53 23.97,59.53 U32.C_IN
N$41  (via drill 0.3)
  Top 0.203: v43.18,63.66 43.18,79.22 49.21,85.25 49.21,91.44 55.09,97.31 v55.09,99.85
  Bottom 0.203: v43.18,63.66 44.13,63.66 U5.D_OUT | v55.09,99.85 55.4,99.85 55.88,99.38 U9.D_IN
N$43  (via drill 0.3)
  Top 0.203: v69.37,66.36 68.42,67.31 68.42,67.63 R7.1 | v64.29,64.45 64.29,62.71 64.93,62.07 64.93,60.48 T2.B
  Bottom 0.203: v69.37,66.36 66.2,66.36 v64.29,64.45
N$44  (via drill 0.3)
  Top 0.203: v43.18,62.71 49.69,69.22 49.69,91.28 v56.83,98.42
  Bottom 0.203: v43.18,62.71 44.13,62.71 U5.CL_OUT | v56.83,98.42 56.04,98.42 U9.C_IN
N$45  (via drill 0.3)
  Top 0.203: v58.42,89.22 57.78,89.22 v53.18,93.82
  Bottom 0.203: v58.42,89.22 59.37,88.27 59.37,77.95 66.83,70.48 68.58,70.48 70.01,69.06 70.8,69.06 U12.D_IN | v53.18,93.82 53.18,98.42 53.98,99.22 U9.D_OUT
N$46  (via drill 0.3)
  Top 0.203: v55.09,93.5 64.29,84.3 64.29,79.69 v67.15,76.83 | v67.15,72.07 67.63,71.6 68.9,71.6 70.01,70.48 70.01,66.67 v70.33,66.36
  Bottom 0.203: v55.09,93.5 55.09,97.47 54.29,98.27 54.13,98.27 U9.CL_OUT | v67.15,72.07 v67.15,76.83 | v70.33,66.36 70.33,66.67 70.17,66.83 70.17,67.47 70.8,68.1 U12.C_IN
N$48  (via drill 0.3)
  Top 0.203: v105.25,64.14 77.47,64.14 v76.99,64.61 | v68.1,64.61 66.2,66.52 v66.2,68.74
  Bottom 0.203: v105.25,64.14 104.3,64.14 U15.D_IN | v68.1,64.61 v76.99,64.61 | v66.2,68.74 68.74,68.74 68.9,68.9 U12.D_OUT
N$49  (via drill 0.3)
  Top 0.203: v67.15,71.12 67.15,68.9 66.83,68.58 v66.83,68.1
  Bottom 0.203: v67.15,71.12 69.69,71.12 71.44,69.37 73.18,69.37 77.47,65.09 102.55,65.09 103.19,64.45 103.19,64.14 103.98,63.34 104.14,63.34 U15.C_IN | v66.83,68.1 68.9,68.1 U12.CL_OUT
N$50  (via drill 0.3)
  Top 0.203: v81.6,40.64 81.92,40.64 100.49,59.21 v100.49,62.39
  Bottom 0.203: v81.6,40.64 80.17,40.64 U18.D_IN | v100.49,62.39 102.08,63.98 102.39,63.98 U15.D_OUT
N$51  (via drill 0.3)
  Top 0.203: v81.28,39.69 82.87,39.69 101.44,58.26 v101.44,62.39
  Bottom 0.203: v81.28,39.69 80.17,39.69 U18.C_IN | v101.44,62.39 102.39,63.34 U15.CL_OUT
N$52  (via drill 0.3)
  Top 0.203: v79.22,40.01 79.22,35.4 v82.39,32.23
  Bottom 0.203: v79.22,40.01 78.74,40.48 78.42,40.48 U18.D_OUT | v82.39,32.23 82.39,10.64 85.72,7.3 U21.D_IN
N$53  (via drill 0.3)
  Top 0.203: v86.68,6.67 86.68,7.14 79.22,14.61 v79.22,34.45
  Bottom 0.203: v86.68,6.67 86.36,6.35 85.88,6.35 U21.C_IN | v79.22,34.45 79.22,38.89 78.42,39.69 U18.CL_OUT
N$55  (via drill 0.3)
  Top 0.203: v83.03,7.3 v72.39,17.94
  Bottom 0.203: v72.39,17.94 65.09,25.24 60.33,25.24 58.1,23.02 56.04,23.02 U24.D_IN | v83.03,7.3 83.98,7.3 U21.D_OUT
N$56  (via drill 0.3)
  Top 0.203: v62.39,20.32 v60.01,22.7
  Bottom 0.203: v60.01,22.7 59.37,22.07 56.04,22.07 U24.C_IN | v62.39,20.32 67.94,20.32 83.5,4.76 84.45,4.76 84.77,5.08 84.77,5.71 84.14,6.35 U21.CL_OUT
N$58  (via drill 0.3)
  Top 0.203: v30.32,7.3 v27.94,7.3
  Bottom 0.203: v27.94,7.3 26.04,7.3 U27.D_IN | v30.32,7.3 30.64,7.3 42.86,19.53 53.5,19.53 54.93,20.95 54.93,22.23 54.13,23.02 U24.D_OUT
N$60
  Bottom 0.203: U27.C_IN 25.88,6.19 25.72,6.19 25.24,5.71 25.24,5.08 25.56,4.76 28.73,4.76 42.86,18.89 60.01,18.89 62.07,20.95 68.42,20.95 72.07,17.3 72.71,17.3 73.03,17.62 73.03,18.26 64.93,26.35 56.52,26.35 53.34,23.18 53.34,22.7 53.98,22.07 U24.CL_OUT
N$61  (via drill 0.3)
  Top 0.203: v28.26,12.86 28.26,27.94 33.81,33.5 33.81,38.42 v33.02,39.21
  Bottom 0.203: v28.26,12.86 24.29,8.89 24.29,7.3 U27.D_OUT | v33.02,39.21 31.75,40.48 U30.D_IN
N$62  (via drill 0.3)
  Top 0.203: v29.21,12.86 29.21,27.94 v30.48,29.21
  Bottom 0.203: v29.21,12.86 25.24,8.89 25.24,7.14 24.77,6.67 24.61,6.67 24.29,6.35 U27.CL_OUT | v30.48,29.21 30.48,34.29 32.38,36.2 32.38,39.05 31.75,39.69 U30.C_IN
N$63  (via drill 0.3)
  Top 0.203: v26.67,42.7 v28.73,40.64 | v19.53,50.8 8.41,61.91 v8.41,63.82
  Bottom 0.203: v28.73,40.64 29.84,40.64 U30.D_OUT | v26.67,42.7 24.45,42.7 21.43,45.72 21.43,48.9 v19.53,50.8 | v8.41,63.82 7.78,63.82 7.62,63.98 U33.D_IN
N$64  (via drill 0.3)
  Top 0.203: v9.21,63.18 v11.75,60.64
  Bottom 0.203: v11.75,60.64 21.91,50.48 21.91,45.88 23.81,43.97 26.35,43.97 27.3,43.02 27.3,41.12 28.73,39.69 29.84,39.69 U30.CL_OUT | v9.21,63.18 7.62,63.18 U33.C_IN
POWER_INPUT
  Top 0.762: BAT1.+ 55.09,80.96 58.58,80.96 62.39,77.15 64.93,77.15 R4.2 65.25,76.83 65.88,76.83 69.37,73.34 69.37,72.07 70.64,70.8 70.64,67.63 71.75,66.52 C1.A 71.91,66.04 72.87,65.09 72.87,61.59 T1.E 73.34,61.44 75.88,58.9 75.88,48.1 | 75.88,48.1 74.77,48.1 71.44,44.77 L1.P$1 | 75.88,48.1 77.15,48.1 | 77.15,48.1 79.85,48.1 84.45,52.7 85.72,52.7 R3.2 | 77.15,48.1 77.15,32.38 D1.C
RST  (via drill 0.3)
  Top 0.203: 38.26,60.96 38.42,61.12 38.42,64.14 38.26,64.29 28.73,64.29 27.3,62.87 23.18,62.87 C9.2 | 38.26,60.96 33.81,60.96 33.66,61.12 R12.1 33.5,61.12 32.86,61.12 30.64,58.9 30.64,58.42 U34.29 | v71.75,25.88 69.06,23.18 69.06,18.57 ICSP.5 | v63.18,34.45 63.18,47.62 56.36,54.45 51.12,54.45 50.8,54.77 48.74,54.77 v45.09,51.12 | v40.48,47.94 40.48,58.74 38.26,60.96
  Bottom 0.203: v63.18,34.45 v71.75,25.88 | v45.09,51.12 45.09,49.69 44.29,48.9 44.29,48.26 43.97,47.94 v40.48,47.94
RXD  (via drill 0.3)
  Top 0.203: v31.27,55.24 29.84,56.67 29.84,58.26 U34.30 | v31.27,52.7 32.07,52.7 34.45,50.32 v34.45,42.07 | v46.2,23.02 46.2,22.54 44.13,20.48 44.13,18.73 SERIAL.5
  Bottom 0.203: v31.27,52.7 v31.27,55.24 | v34.45,42.07 46.2,30.32 v46.2,23.02
SCK  (via drill 0.3)
  Top 0.203: 56.83,43.81 56.83,41.27 61.91,36.2 61.91,21.75 63.02,20.64 63.02,19.37 63.34,19.05 63.98,19.05 64.61,19.68 66.36,19.68 66.83,19.21 66.83,18.57 ICSP.3 | 56.83,43.81 v56.83,50.8 | v35.4,42.23 35.4,51.12 U34.17 | 56.83,43.81 v46.2,33.18
  Bottom 0.203: v56.83,50.8 56.04,50.8 U3.C_IN | v35.4,42.23 44.45,33.18 v46.2,33.18
SCL  (via drill 0.3)
  Top 0.203: v37.78,37.78 37.78,38.89 Q3.3 | v31.11,32.7 30.16,33.66 R17.1 | v31.27,56.2 31.27,58.26 U34.28 | v29.84,47.15 28.89,46.2 28.89,44.93 v33.18,40.64
  Bottom 0.203: 36.04,37.78 35.72,37.78 31.11,33.18 v31.11,32.7 | 36.04,37.78 v37.78,37.78 | v31.27,56.2 29.84,54.77 v29.84,47.15 | 36.04,37.78 v33.18,40.64
SDA  (via drill 0.3)
  Top 0.203: v37.62,49.85 37.62,46.67 Q4.3 | v32.23,55.24 32.23,58.26 U34.27 | v23.81,46.51 22.86,45.56 R18.1
  Bottom 0.203: v32.23,55.24 35.56,51.91 | 35.56,51.91 v37.62,49.85 | v23.81,46.51 30.16,46.51 35.56,51.91
SW  (via drill 0.3)
  Top 0.305: 70.33,50.48 U1.8
  Top 0.406: 70.33,50.16 U1.8
  Top 0.508: 70.33,50.48 72.07,52.23 | 72.07,52.23 72.71,52.86 73.18,52.86 C3.2 | 70.33,50.16 70.33,48.74 67.47,45.88 67.31,45.88 66.2,44.77 L1.P$2 | v82.23,46.67 84.45,46.67 D2.A | 72.07,52.23 v73.03,51.28
  Bottom 0.508: v82.23,46.67 77.63,46.67 v73.03,51.28
TXD  (via drill 0.3)
  Top 0.203: v29.05,57.15 29.05,58.26 U34.31 | v20.8,47.78 v23.5,47.78 | v32.07,23.18 33.97,23.18 39.69,17.46 42.39,17.46 43.02,18.1 43.02,18.57 SERIAL.4
  Bottom 0.203: v29.05,57.15 29.05,51.12 25.72,47.78 v23.5,47.78 | v20.8,47.78 20.8,45.56 28.26,38.1 28.26,30.8 28.1,30.64 28.1,27.15 v32.07,23.18